# Altium PCB PCB2.PcbDoc (part 2 of 2)
Units mm, origin at the board's own origin, x right, y up, seen from the top; angles counter-clockwise.
Board outline 57.97 x 94.13 mm, 2 copper layers (Top Layer, Bottom Layer); 87 components, 62 nets, 335 pads, 103 vias.
Unrouted connection lines stored in the file: 22.
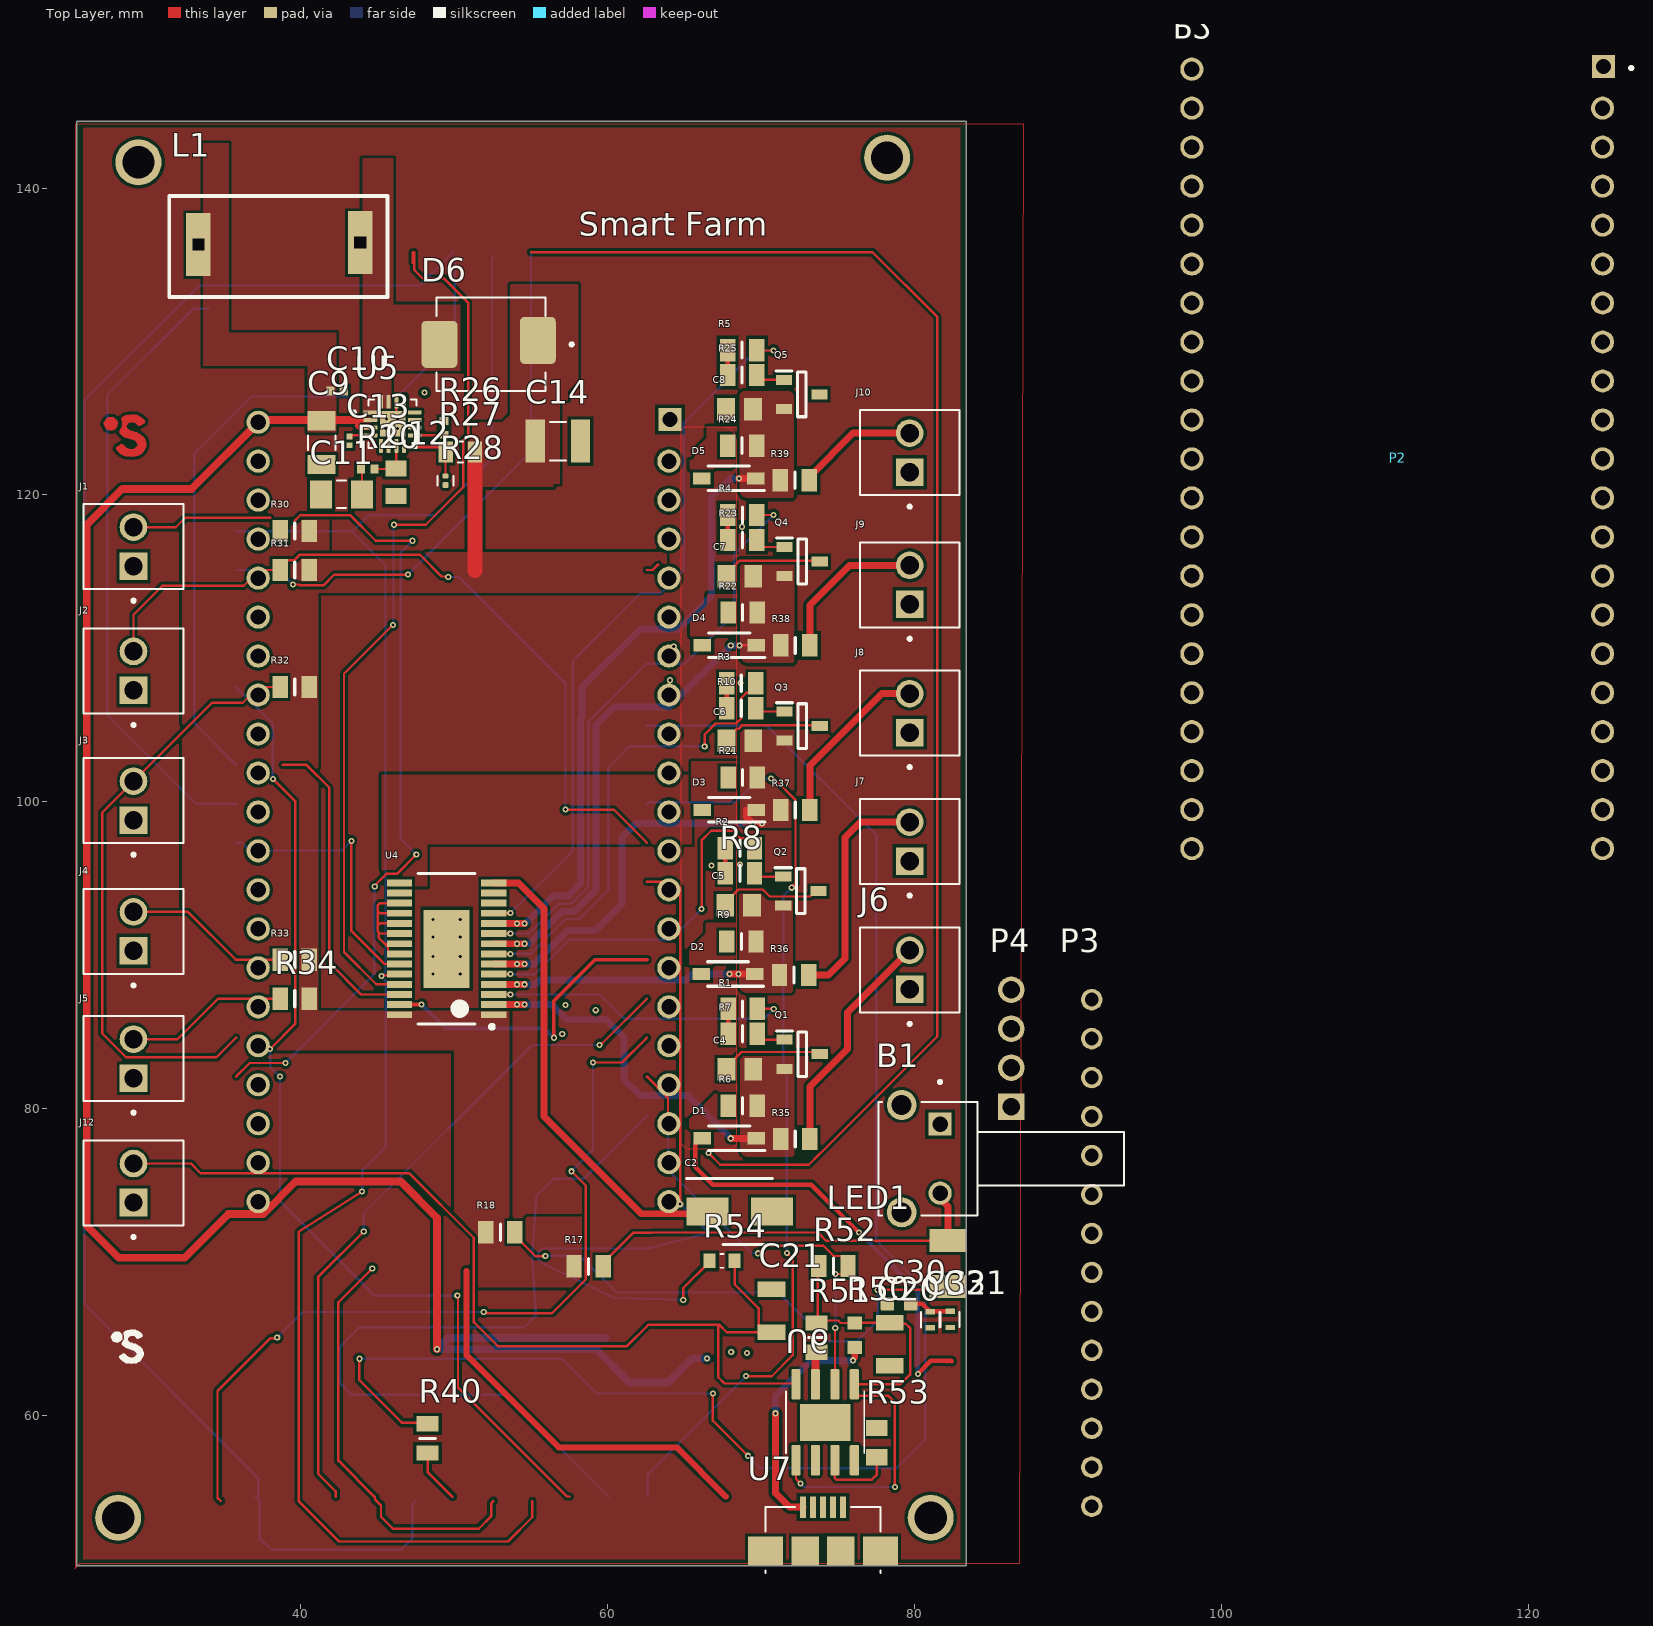
[diagram p0: Top Layer view]

## Other copper (continued)
Top Layer: (continued)
  region: 28.366,125.058 28.499,125.149 28.52,125.17 28.59,125.198 28.759,125.212 28.801,125.226 28.899,125.24 29.291,125.226 29.334,125.212 29.446,125.17 29.544,125.1 29.642,125.044 29.691,124.995 29.705,124.967 29.726,124.946 29.754,124.932 29.831,124.855 29.845,124.799 29.831,124.7 29.81,124.679 29.782,124.665 29.684,124.609 29.586,124.539 29.488,124.511 29.404,124.525 29.376,124.553 29.348,124.567 29.299,124.616 29.284,124.644 29.235,124.679 29.109,124.736 28.829,124.721 28.724,124.644 28.709,124.616 28.639,124.546 28.625,124.49 28.639,124.392 28.773,124.259 28.801,124.245 28.927,124.189 29.004,124.168 29.06,124.153 29.179,124.118 29.291,124.09 29.53,123.964 29.572,123.922 29.6,123.908 29.677,123.845 29.705,123.817 29.719,123.789 29.817,123.691 29.902,123.48 29.916,123.424 29.93,123.326 29.916,123.172 29.845,123.017 29.831,122.961 29.74,122.828 29.649,122.737 29.635,122.709 29.614,122.688 29.586,122.674 29.46,122.604 29.376,122.548 29.27,122.527 28.983,122.492 28.927,122.506 28.604,122.52 28.562,122.534 28.471,122.555 28.233,122.695 28.127,122.8 28.099,122.814 28.078,122.835 28.064,122.863 27.952,122.975 27.966,123.088 28.001,123.137 28.029,123.151 28.057,123.179 28.127,123.207 28.156,123.221 28.219,123.27 28.233,123.298 28.31,123.333 28.394,123.319 28.471,123.242 28.485,123.214 28.576,123.123 28.604,123.109 28.632,123.081 28.702,123.053 28.801,123.01 28.899,122.996 29.123,123.01 29.221,123.067 29.256,123.088 29.27,123.116 29.299,123.144 29.313,123.172 29.355,123.242 29.369,123.298 29.313,123.396 29.214,123.522 29.039,123.6 28.815,123.656 28.716,123.698 28.618,123.726 28.562,123.74 28.492,123.768 28.464,123.796 28.436,123.81 28.394,123.852 28.366,123.866 28.338,123.894 28.31,123.908 28.219,123.999 28.177,124.097 28.191,124.21 28.261,124.308 28.317,124.406 28.359,124.504 28.345,124.771 28.317,124.841 28.303,124.897 28.317,125.009 28.338,125.044 28.359,125.051

## Silkscreen, mask and mechanical layers (free items; w line width, h text height)
Top Overlay:
  drawing of 2 lines, arcs and shapes, not listed
  text "Smart Farm" at 58.115,136.881 h1.52
Bottom Overlay:
  drawing of 29 lines, arcs and shapes, not listed
  text "OUT1" at 74.362,121.954 h1.52
  text "GND" at 75.378,117.604 h1.52
  text "RESET" at 25.604,112.829 h1.52
  text "OUT2" at 73.854,111.379 h1.52
  text "GND" at 30.329,107.079 h1.52
  text "GND" at 75.378,107.004 h1.52
  text "IN1" at 30.329,103.679 h1.52
  text "GND" at 30.329,101.104 h1.52
  text "OUT3" at 73.854,99.829 h1.52
  text "IN2" at 30.329,97.779 h1.52
  text "GND" at 75.378,95.829 h1.52
  text "GND" at 30.329,95.204 h1.52
  text "IN3" at 30.329,91.854 h1.52
  text "OUT4" at 73.854,89.329 h1.52
  text "GND" at 30.329,89.154 h1.52
  text "IN4" at 30.329,86.129 h1.52
  text "GND" at 76.813,85.95 h1.52
  text "GND" at 30.329,83.004 h1.52
  text "IN5" at 30.329,80.079 h1.52
  text "OUT5" at 73.854,78.504 h1.52
  text "GND" at 30.329,77.154 h1.52
  text "GND" at 75.378,74.554 h1.52
  text "Vcc" at 30.329,73.704 h1.52
  text "GND" at 30.329,71.254 h1.52
Mechanical 1:
  circle w0.254: c28.477,57.573 r2

## Text inside footprints (layer, text, board x,y; h text height)
U7: Top 3D Body "PCB Edge" at 79.384,49.931 h1